# Altium PCB FZ2.PCBDOC
Units mm, origin at the board's own origin, x right, y up, seen from the top; angles counter-clockwise.
Board outline 278.13 x 144.14 mm, 2 copper layers (Top Layer, Bottom Layer); 35 components, 25 nets, 138 pads, 25 vias.
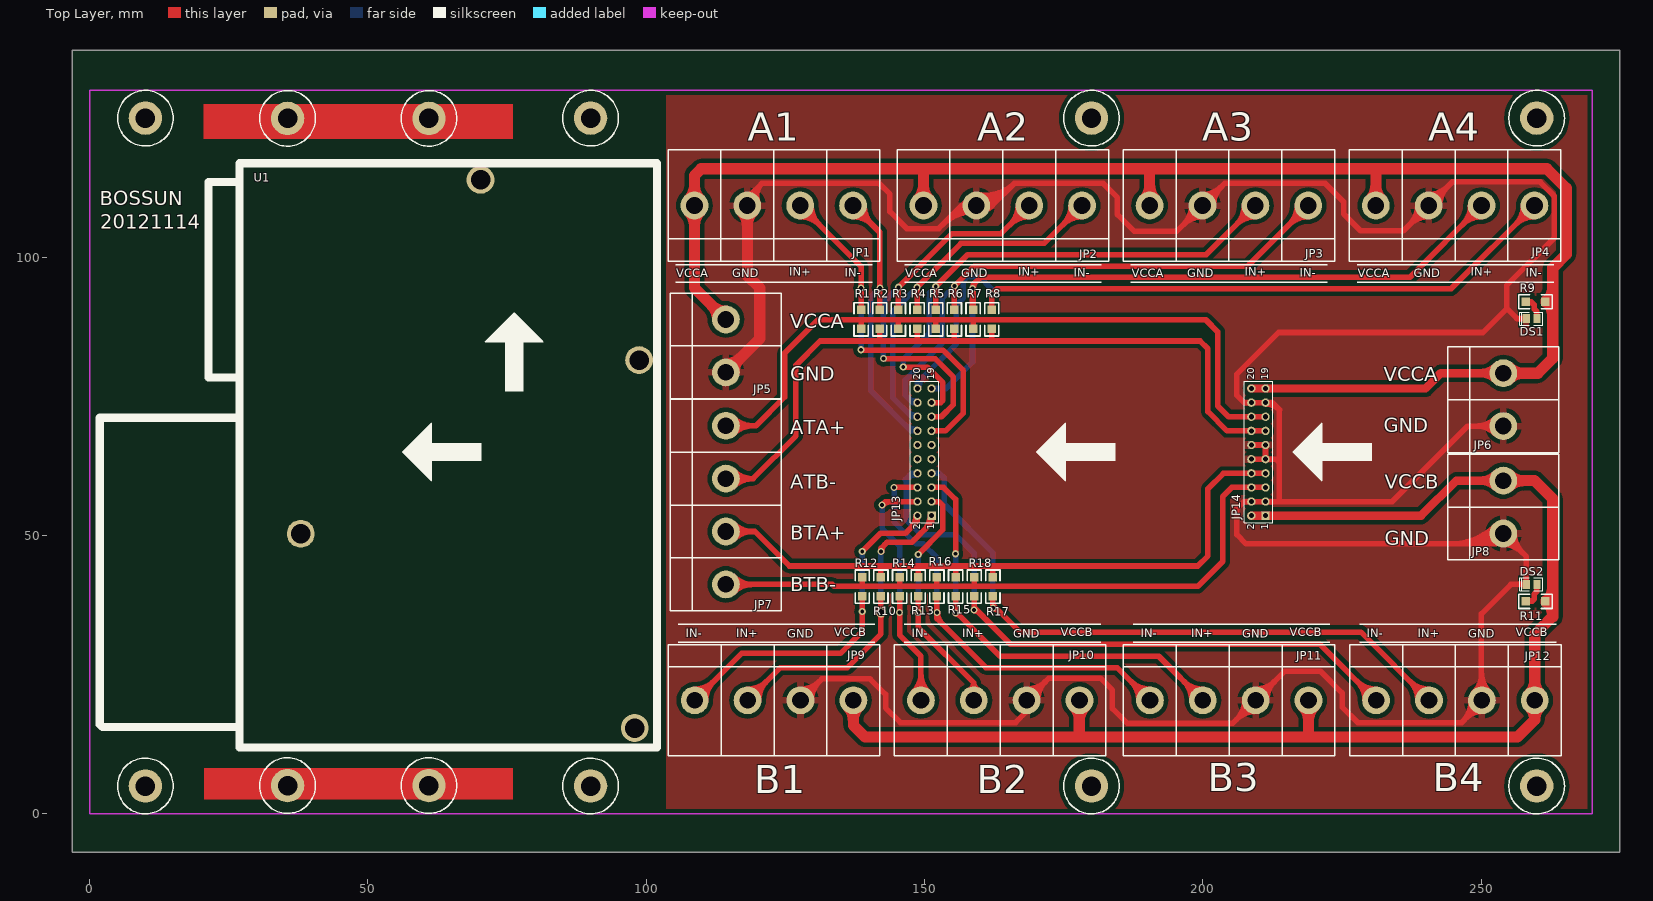
[diagram p0: Top Layer view]
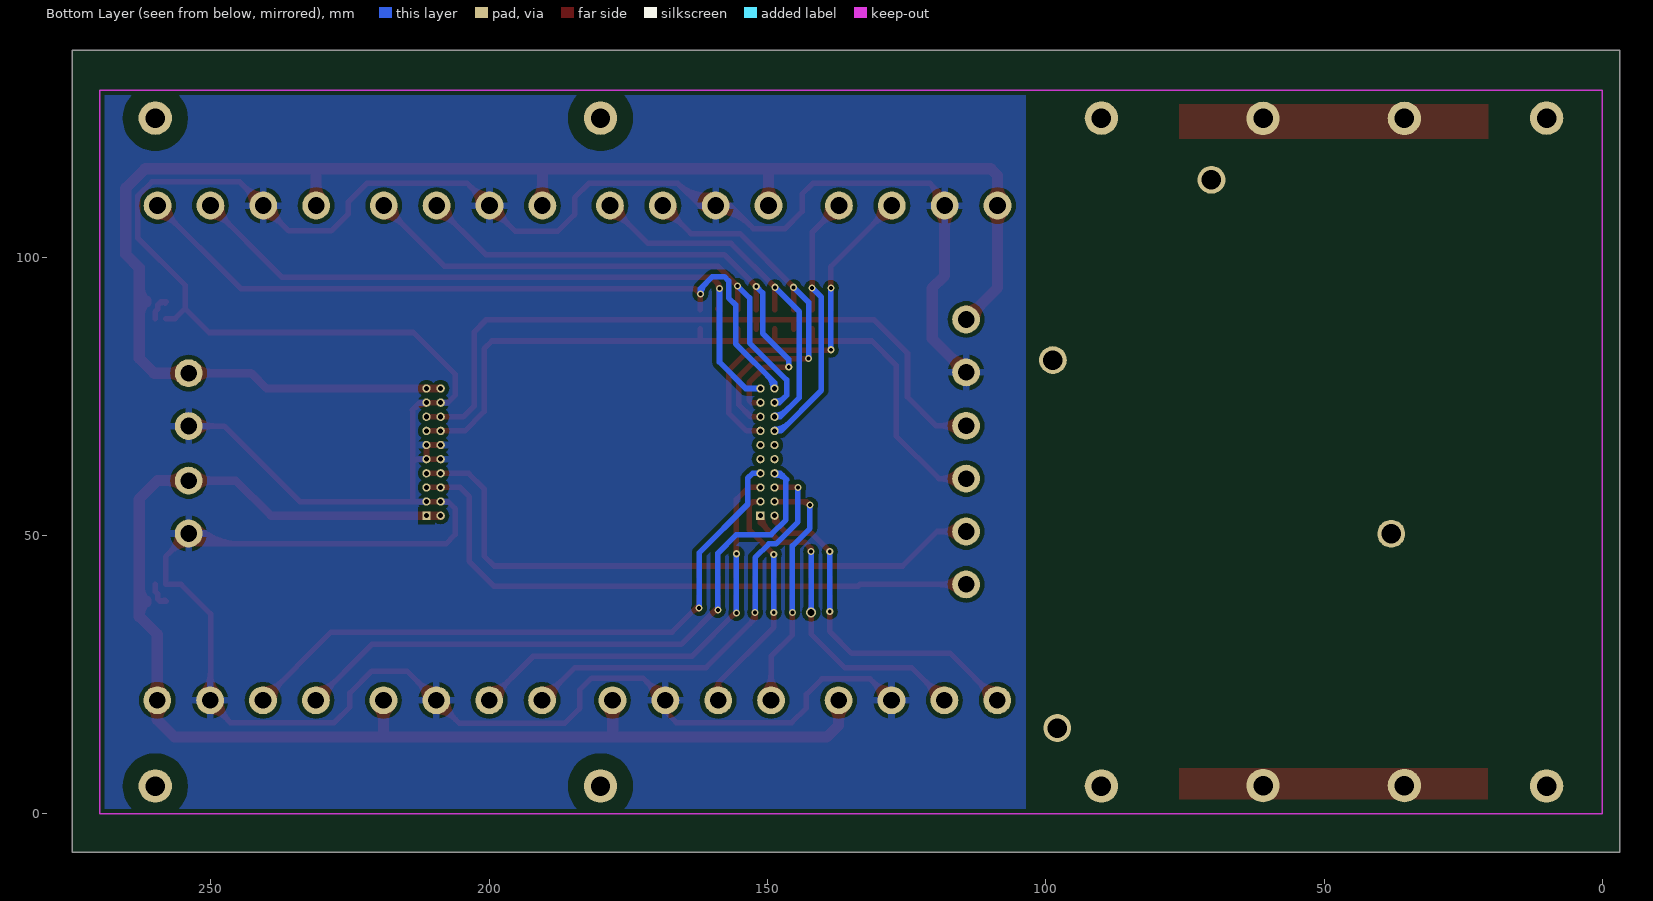
[diagram p1: Bottom Layer view, seen from below]

## Layer stack, top to bottom
Top Layer: signal copper 0.0356
Dielectric: dielectric 0.32, FR-4, Dk 4.8
Bottom Layer: signal copper 0.0356

## Board outline
-2.032,137.24 274.955,137.24 274.955,-6.905 -3.175,-6.905 -3.175,137.24

## Design rules (kind name [scope] priority, off if disabled: settings)
Clearance Clearance_1 [(InPolygon)] p1: gap=0.762
Clearance [All] p2: gap=0.254
ComponentClearance [All] p1: gap=0.254 collisioncheckmode=0
HoleSize [All] p1: absolutevalues=TRUE maxlimit=100 minlimit=0.025 maxpercent=80.000 minpercent=20.000
PolygonConnect [All] p1: connectstyle=Relief reliefconductorwidth=1.27 reliefentries=4 polygonreliefangle="90 Angle"
RoutingVias [All] p1: holewidth=1.27 width=1.778 viastyle="Through Hole" minholewidth=0.711 minwidth=1.27 maxholewidth=2.54 maxwidth=2.54
SolderMaskExpansion [All] p1: expansion=0.102
TestPointUsage [All] p1: valid=0 allowmultiple=FALSE
Testpoint [All] p1: side=15 testpointundercomponent=TRUE minsize=1.016 maxsize=2.54 preferedsize=1.524 minholesize=0 maxholesize=1.016 preferedholesize=0.813 testpointgrid=0.025 style=1023 order=1234567890
Width [All] p1: maxlimit=100 minlimit=0.254 preferedwidth=0.254
16 further rules are at their usual default settings.

## Components (designator, comment, footprint, x,y, rotation, side; value= is the part's Value field where it differs from the comment)
DS1 "POWER-A" "SMD _LED" 259.08,88.98 r0 top
DS2 "POWER-B" "SMD _LED" 259.08,41.228 r0 top
JP1 "Header 4" duanzi-4 137.16,109.3 r180 top
JP2 "Header 4" duanzi-4 178.308,109.3 r180 top
JP3 "Header 4" duanzi-4 218.948,109.3 r180 top
JP4 "Header 4" duanzi-4 259.588,109.3 r180 top
JP5 "Header 2" duanzi-2 114.3,79.328 r90 top
JP6 "Header 2" duanzi-2 254,69.676 r90 top
JP7 "Header 4" duanzi-4 114.3,41.228 r90 top
JP8 "Header 2" duanzi-2 254,50.372 r90 top
JP9 "Header 4" duanzi-4 108.712,20.4 r0 top
JP10 "Header 4" duanzi-4 149.352,20.4 r0 top
JP11 "Header 4" duanzi-4 190.5,20.4 r0 top
JP12 "Header 4" duanzi-4 231.14,20.4 r0 top
JP13 "Header 10X2" HDR2X10 151.27,53.57 r90 top
JP14 "Header 10X2" HDR2X10 211.27,53.57 r90 top
R1 "Res2" 1206 138.608,87.122 r90 top
R2 "Res2" 1206 141.961,87.122 r90 top
R3 "Res2" 1206 145.313,87.122 r90 top
R4 "Res2" 1206 148.666,87.122 r90 top
R5 "Res2" 1206 152.019,87.122 r90 top
R6 "Res2" 1206 155.372,87.122 r90 top
R7 "Res2" 1206 158.725,87.122 r90 top
R8 "Res2" 1206 162.077,87.122 r90 top
R9 "Res2" 1206 258.064,92.028 r0 top
R10 "Res2" 1206 142.164,42.545 r270 top
R11 "Res2" 1206 258.064,38.18 r0 top
R12 "Res2" 1206 138.811,42.545 r270 top
R13 "Res2" 1206 148.869,42.545 r270 top
R14 "Res2" 1206 145.517,42.545 r270 top
R15 "Res2" 1206 155.575,42.545 r270 top
R16 "Res2" 1206 152.222,42.545 r270 top
R17 "Res2" 1206 162.281,42.545 r270 top
R18 "Res2" 1206 158.928,42.545 r270 top
U1 "MODE" sw-tcpip 26.924,116.92 r270 top locked

## Footprints (in the part's own frame and the unit in brackets; to place one, negate y for a bottom-side part, rotate by r counter-clockwise, add the part's x,y. Pads: shape width x height; smd on the part's side, far side on the other; paste and mask are expansions set on the pad)
1206 [mil]
  rect 60x60 smd: 1(0,0) 2(135,0)
  silkscreen extent -50,-50 185,50
duanzi-2 [mm]
  round 5 hole 3: 1(0,0) 2(9.5,0)
  silkscreen extent -4.75,-10 14.25,10
duanzi-4 [mm]
  round 5 hole 3: 1(0,0) 2(9.5,0) 3(18.999,0) 4(28.499,0)
  silkscreen extent -4.75,-10 33.25,10
HDR2X10 [mm] "Connector; Header; 10x2 Position"
  rect 1.5x1.5 hole 0.9: 1(0,0)
  round 1.5 hole 0.9: 2(0,2.54) 3(2.54,0) 4(2.54,2.54) 5(5.08,0) 6(5.08,2.54) 7(7.62,0) 8(7.62,2.54) 9(10.16,0) 10(10.16,2.54) 11(12.7,0) 12(12.7,2.54) 13(15.24,0) 14(15.24,2.54) 15(17.78,0) 16(17.78,2.54) 17(20.32,0) 18(20.32,2.54) 19(22.86,0) 20(22.86,2.54)
  silkscreen extent -1.27,-1.27 24.13,3.81
"SMD _LED" [mm]
  rect 1.3x1.6 smd: 1(0.95,0) 2(-0.95,0)
  silkscreen extent -2.13,-1.15 2,1.15
sw-tcpip [mm]
  round 5 hole 3.5: 1(3,43.3) 2(35.4,71.8) 3(101.5,71) 4(66.6,11)
  silkscreen extent 0,-25.1 105,75

## Part data
DS1 DS2: library part LED3, "Typical BLUE SiC LED"
JP1 JP2 JP3 JP4 JP7 JP9 JP10 JP11 JP12: "Header, 4-Pin"
JP5 JP6 JP8: "Header, 2-Pin"
JP13 JP14: library part "Header 5X2", "Header, 5-Pin, Dual row"
R1 R2 R3 R4 R5 R6 R7 R8 R9 R10 R11 R12 R13 R14 R15 R16 R17 R18: "Resistor"
U1: library part PLL, "Generic Phase Locked Loop"

## Free pads (board coordinates)
  round 6 hole 3.5: 0(10,5) 0(10,125) 0(35.56,5.08) 0(35.56,124.968) 0(60.96,5.08) 0(60.96,124.968) 0(90,5) 0(90,125) 0(180,5) 0(180,125) 0(260,5) 0(260,125)

## Via types
v1: diameter 1.27, hole 0.711, Top Layer to Bottom Layer, 24 vias
v2: diameter 1.778, hole 1.27, Top Layer to Bottom Layer, 1 vias

## Nets (pads, with @x,y where several pads share a name; then routed paths per layer and width w, separated by ;. In a path a pad name is that pad's centre, name@x,y a point inside that pad or via, vN(x,y) a via of type N, cw(c..) or ccw(c..) an arc to the next point about the centre after c; other vN are vias at no path point)
485AA+: JP7.4 JP14.15 JP14.16 R1.1 R3.1 R5.1 R7.1 | length 138.7
  Top Layer w1: JP7.4 119.685,69.727 124.841,74.883 124.841,82.757 130.857,88.773 200.533,88.773 202.692,86.614 202.692,73.279 204.621,71.35 JP14.15 ; JP7.4@115.714,68.313 cw(c119.128,64.899) 119.128,69.727 cw(c119.128,74.556) JP7.4@115.714,71.141 ; R1.1 138.608,88.773 ; R3.1 145.313,88.748 ; R5.1 152.019,88.697 ; 158.42,88.773 158.725,88.468 R7.1
485AB-: JP7.3 JP14.13 JP14.14 R2.1 R4.1 R6.1 R8.1 | length 144
  Top Layer w1: JP7.3 119.202,60.227 126.873,67.898 126.873,80.598 131.238,84.963 199.517,84.963 200.914,83.566 200.914,72.263 204.367,68.81 JP14.13 ; JP7.3@115.714,58.813 cw(c119.128,55.399) 119.128,60.227 cw(c119.128,65.056) JP7.3@115.714,61.641 ; 141.961,85.014 R2.1 ; 148.666,85.115 R4.1 ; 155.372,84.963 R6.1 ; 162.077,84.988 R8.1
485BA+: JP7.2 JP14.7 JP14.8 R10.1 R13.1 R15.1 R17.1 | length 128.4
  Top Layer w1: JP7.2 119.532,50.728 125.73,44.53 199.089,44.53 200.914,46.355 200.914,58.42 203.684,61.19 JP14.7 ; JP7.2@115.714,49.314 cw(c119.128,45.9) 119.128,50.728 cw(c119.128,55.556) JP7.2@115.714,52.142 ; R10.1 142.164,44.247 ; R13.1 148.869,44.298 ; R15.1 155.575,44.403 ; R17.1 162.281,44.505
485BB-: JP7.1 JP14.5 JP14.6 R12.1 R14.1 R16.1 R18.1 | length 124.9
  Top Layer w1: JP7.1 133.397,41.228 133.731,40.894 199.136,40.894 203.581,45.339 203.581,57.023 205.208,58.65 JP14.5 ; JP7.1@115.714,39.814 cw(c119.128,36.4) 119.128,41.228 cw(c119.128,46.056) JP7.1@115.714,42.642 ; 138.811,40.894 R12.1 ; 145.517,40.996 R14.1 ; 152.222,40.97 R16.1 ; 158.928,41.326 R18.1
A0: JP1.2 JP13.13 R1.2 | length 76.5
  Top Layer w1: JP1.2@127.66,107.3 cw(c127.66,102.472) 131.074,105.886 cw(c134.488,109.3) JP1.2@129.66,109.3 ; JP1.2 138.608,98.352 R1.2 ; v1(138.608,83.388) 138.684,83.312 153.289,83.312 156.972,79.629 156.972,72.009 153.773,68.81 JP13.13
  Bottom Layer w1: v1(138.608,83.388) v1(138.608,94.488)
A1: JP1.1 JP13.14 R2.2 | length 61.4
  Top Layer w1: JP1.1@137.16,107.3 cw(c137.16,102.472) 140.574,105.886 cw(c143.988,109.3) JP1.1@139.16,109.3 ; JP1.1 141.961,104.499 R2.2
  Bottom Layer w1: v1(141.961,94.488) 140.335,92.862 140.335,76.073 147.598,68.81 JP13.14 ; 146.371,70.037 ccw(c148.73,72.396) JP13.14@148.73,69.06
A2: JP2.2 JP13.15 R3.2 | length 78.9
  Top Layer w1: v1(142.621,81.788) 151.892,81.788 155.194,78.486 155.194,73.533 153.011,71.35 JP13.15 ; R3.2 v1(145.313,94.615) 154.965,104.267 163.775,104.267 JP2.2 ; JP2.2@166.808,109.3 cw(c161.98,109.3) 165.394,105.886 cw(c168.808,102.472) JP2.2@168.808,107.3
  Bottom Layer w1: v1(142.621,81.788) 142.621,91.923 v1(145.313,94.615)
A3: JP2.1 JP13.16 R4.2 | length 77.3
  Top Layer w1: R4.2 v1(148.666,94.615) 156.54,102.489 171.497,102.489 JP2.1 ; JP2.1@176.308,109.3 cw(c171.48,109.3) 174.894,105.886 cw(c178.308,102.472) JP2.1@178.308,107.3
  Bottom Layer w1: 146.588,72.487 ccw(c148.73,74.63) JP13.16@148.73,71.6 ; v1(148.666,94.615) 144.272,90.221 144.272,74.803 147.725,71.35 JP13.16
A4: JP3.2 JP13.17 R5.2 | length 105.9
  Top Layer w1: v1@146.304,80.391 v1(146.177,80.264) 150.495,80.264 153.289,77.47 153.289,74.295 152.884,73.89 JP13.17 ; R5.2 v1(152.019,94.742) 157.734,100.457 200.605,100.457 JP3.2 ; JP3.2@207.448,109.3 cw(c202.62,109.3) 206.034,105.886 cw(c209.448,102.472) JP3.2@209.448,107.3
  Bottom Layer w1: v1(146.177,80.264) 146.177,81.661 150.869,86.353 150.869,93.592 v1(152.019,94.742)
A5: JP3.1 JP13.18 R6.2 | length 109.4
  Top Layer w1: R6.2 v1(155.372,94.869) 158.928,98.425 208.073,98.425 JP3.1 ; JP3.1@216.948,109.3 cw(c212.12,109.3) 215.534,105.886 cw(c218.948,102.472) JP3.1@218.948,107.3
  Bottom Layer w1: 146.997,74.745 ccw(c148.488,76.236) JP13.18@148.704,74.139 ; JP13.18 147.852,73.89 146.558,75.184 146.558,77.978 153.212,84.632 153.212,92.71 v1(155.372,94.869)
A6: JP4.2 JP13.19 R7.2 | length 138.1
  Top Layer w1: R7.2@158.623,90.424 v1(158.623,94.386) ; 158.623,91.429 ccw(c159.602,91.429) R7.2@158.91,90.736 ; R7.2 158.725,95.098 160.02,96.393 237.181,96.393 JP4.2 ; v1@158.758,94.386 cw(c160.556,94.386) 159.285,95.658 ; JP4.2@248.088,109.3 cw(c243.26,109.3) 246.674,105.886 cw(c250.088,102.472) JP4.2@250.088,107.3
  Bottom Layer w1: JP13.19 153.9,76.43 158.623,81.153 v1(158.623,94.386)
A7: JP4.1 JP13.20 R8.2 | length 149.1
  Top Layer w1: R8.2 162.077,93.37 163.068,94.361 244.649,94.361 JP4.1 ; JP4.1@257.588,109.3 cw(c252.76,109.3) 256.174,105.886 cw(c259.588,102.472) JP4.1@259.588,107.3
  Bottom Layer w1: JP13.20 148.73,77.483 155.702,84.455 155.702,91.44 156.972,92.71 156.972,95.758 157.734,96.52 159.893,96.52 162.052,94.361 v1(162.052,93.396) ; JP13.20@148.98,76.43 cw(c152.126,76.43) 149.901,78.654 ; 161.139,95.274 cw(c159.261,93.396) v1@161.917,93.396
B0: JP9.2 JP13.1 R10.2 | length 76
  Top Layer w0.8: JP9.2 JP9.2@118.212,20.803
  Top Layer w1: JP9.2 124.101,26.289 136.144,26.289 142.164,32.309 R10.2 ; JP9.2@118.212,22.4 ccw(c118.212,27.228) 121.626,23.814 ccw(c125.04,20.4) JP9.2@120.212,20.4 ; v2@141.889,35.92 cw(c141.225,35.256) 142.164,35.256 cw(c143.103,35.256) v2@142.439,35.92 ; v2@141.889,36.47 ccw(c141.225,37.134) 142.164,37.134 ccw(c143.103,37.134) v2@142.439,36.47 ; v1(142.164,47.117) 142.164,47.676 143.256,48.768 147.701,48.768 151.27,52.337 JP13.1 ; v1@142.299,47.117 cw(c143.974,47.117) 142.789,48.301 ; 149.971,51.038 ccw(c147.44,53.57) JP13.1@151.02,53.57
  Bottom Layer w1: v2@141.889,36.47 ccw(c141.225,37.134) 142.164,37.134 ccw(c143.103,37.134) v2@142.439,36.47 ; v2(142.164,36.195) v1(142.164,47.117)
B1: JP9.1 JP13.2 R12.2 | length 75.4
  Top Layer w1: JP9.1 117.141,28.829 134.874,28.829 138.811,32.766 R12.2 ; JP9.1@108.712,22.4 ccw(c108.712,27.228) 112.126,23.814 ccw(c115.54,20.4) JP9.1@110.712,20.4 ; v1(138.811,47.117) 142.113,50.419 146.558,50.419 148.73,52.591 JP13.2 ; 147.611,51.472 ccw(c145.513,53.57) JP13.2@148.48,53.57
  Bottom Layer w1: v1(138.811,36.322) v1(138.811,47.117)
B2: JP10.2 JP13.3 R13.2 | length 49.5
  Top Layer w1: R13.2 148.869,33.503 158.852,23.52 ; v1(148.869,46.634) 153.289,51.054 153.289,55.372 152.551,56.11 JP13.3 ; JP10.2@158.017,22.217 ccw(c157.419,23.52) 158.852,23.52 ; JP10.2 158.852,23.52 ; JP10.2@159.687,22.217 cw(c160.285,23.52) 158.852,23.52
  Bottom Layer w1: v1(148.869,36.195) v1(148.869,46.634)
B3: JP10.1 JP13.4 R14.2 | length 57
  Top Layer w1: v1(142.367,55.499) 142.978,56.11 JP13.4 ; v1@142.462,55.404 cw(c144.168,53.698) 144.168,56.11 ; R14.2 145.517,32.156 149.352,28.321 JP10.1 ; JP10.1@147.938,21.814 ccw(c144.524,25.228) 149.352,25.228 ccw(c154.18,25.228) JP10.1@150.766,21.814
  Bottom Layer w1: v1(142.367,55.499) 142.367,51.308 145.517,48.158 v1(145.517,36.195)
B4: JP11.2 JP13.5 R15.2 | length 88
  Top Layer w1: JP13.5 153.44,58.65 155.575,56.515 v1(155.575,46.736) ; v1@155.575,35.933 cw(c155.575,34.994) 156.239,35.658 ; v1(155.575,36.068) R15.2 ; v1@155.575,36.322 163.576,28.321 192.079,28.321 JP11.2 ; JP11.2@198,20.4 ccw(c193.172,20.4) 196.586,23.814 ccw(c200,27.228) JP11.2@200,22.4
  Bottom Layer w1: v1(155.575,36.068) v1(155.575,46.736)
B5: JP11.1 JP13.6 R16.2 | length 88.9
  Top Layer w1: v1(144.526,58.65) JP13.6 ; R16.2 152.222,35.103 161.036,26.289 184.611,26.289 JP11.1 ; v1@152.357,36.195 ccw(c155.32,36.195) 153.225,34.1 ; JP11.1@188.5,20.4 ccw(c183.672,20.4) 187.086,23.814 ccw(c190.5,27.228) JP11.1@190.5,22.4
  Bottom Layer w1: v1(144.526,58.65) 144.526,52.451 148.463,48.514 149.733,48.514 152.222,46.025 v1(152.222,36.195)
B6: JP12.2 JP13.7 R17.2 | length 126
  Top Layer w1: v1@162.281,36.847 cw(c162.281,35.295) 163.378,36.393 ; v1(162.281,36.982) R17.2 ; v1@162.281,37.49 167.132,32.639 228.401,32.639 JP12.2 ; JP12.2@238.64,20.4 ccw(c233.812,20.4) 237.226,23.814 ccw(c240.64,27.228) JP12.2@240.64,22.4
  Bottom Layer w1: JP13.7 152.678,61.19 153.543,60.325 153.543,55.626 162.281,46.888 v1(162.281,36.982)
B7: JP12.1 JP13.8 R18.2 | length 129
  Top Layer w1: v1@158.928,36.492 cw(c158.928,35.185) 159.852,36.109 ; v1(158.928,36.627) R18.2 ; v1@158.928,37.033 165.481,30.48 221.06,30.48 JP12.1 ; JP12.1@229.14,20.4 ccw(c224.312,20.4) 227.726,23.814 ccw(c231.14,27.228) JP12.1@231.14,22.4
  Bottom Layer w1: 146.506,60.019 cw(c148.73,57.794) JP13.8@148.73,60.94 ; 147.151,60.664 cw(c148.114,59.7) JP13.8@148.634,60.959 ; JP13.8 147.677,61.19 146.685,60.198 146.685,52.832 149.352,50.165 155.575,50.165 158.928,46.812 v1(158.928,36.627)
GND: DS1.2 DS2.2 JP1.3 JP2.3 JP3.3 JP4.3 JP5.1 JP6.1 JP8.1 JP9.3 JP10.3 JP11.3 JP12.3 JP14.3 JP14.4 JP14.9 JP14.10 JP14.11 JP14.12 JP14.17 JP14.18 | length 807.1
  Top Layer w1: JP1.3 118.161,110.668 120.777,113.284 ; JP1.3@118.161,111.3 ccw(c118.161,112.826) 119.24,111.747 ; JP1.3@119.101,109.64 cw(c121.374,110.463) 119.665,112.172 ; JP1.3@120.041,109.981 cw(c123.007,111.054) 120.777,113.284 ; JP9.3 131.568,24.257 140.208,24.257 143.002,21.463 143.002,19.05 145.669,16.383 166.37,16.383 168.351,18.364 JP10.3 172.335,24.384 181.61,24.384 183.769,22.225 183.769,18.923 186.436,16.256 205.355,16.256 214.753,25.654 221.107,25.654 225.044,21.717 225.044,19.177 227.838,16.383 246.507,16.383 JP12.3@250.317,20.193 ; JP9.3@127.711,22.4 ccw(c127.711,27.228) 131.125,23.814 ccw(c134.54,20.4) JP9.3@129.711,20.4 ; 153.099,105.728 cw(c159.309,99.518) JP2.3@159.309,108.3 ; 154.806,107.435 cw(c159.309,102.932) JP2.3 ccw(c160.137,113.862) 163.416,110.584 ; 156.513,109.142 cw(c159.309,106.346) JP2.3@159.309,110.3 ; JP2.3@157.383,108.76 ccw(c156.671,108.561) 156.671,109.3 ; JP2.3@157.383,109.84 cw(c156.671,110.039) 156.671,109.3 ; JP2.3@159.13,108.316 ccw(c159.722,111.577) 162.066,109.234 ; JP2.3@159.487,110.284 ccw(c160.552,116.148) 164.766,111.934 ; JP2.3@159.666,111.268 ccw(c160.966,118.433) 166.116,113.284 ; JP2.3@161.196,108.637 cw(c162.132,108.308) 162.132,109.3 ; JP2.3@161.196,109.963 ccw(c162.132,110.292) 162.132,109.3 ; JP10.3@168.351,22.4 ccw(c168.351,27.228) 171.765,23.814 ccw(c175.18,20.4) JP10.3@170.351,20.4 ; JP3.3@197.949,109.3 cw(c193.12,109.3) 196.535,105.886 cw(c199.949,102.472) JP3.3@199.949,107.3 ; JP3.3@199.949,111.3 ccw(c199.949,116.128) 203.363,112.714 ccw(c206.777,109.3) JP3.3@201.949,109.3 ; JP11.3@207.499,20.4 cw(c202.671,20.4) 206.085,16.986 cw(c209.499,13.572) JP11.3@209.499,18.4 ; JP14.10 213.13,63.73 213.741,63.119 ; JP14.12 JP14.11 JP14.9 ; JP11.3@209.499,22.4 ccw(c209.499,27.228) 212.913,23.814 ccw(c216.328,20.4) JP11.3@211.499,20.4 ; JP14.17@211.27,73.64 cw(c211.27,70.079) 213.788,72.597 ; JP14.17@211.358,73.656 cw(c211.939,72.109) 213.107,73.278 ; 213.741,56.11 213.741,72.644 212.495,73.89 207.415,73.89 206.121,75.184 206.121,78.994 213.614,86.487 250.317,86.487 254.635,90.805 ; JP4.3@238.589,109.3 cw(c233.76,109.3) 237.175,105.886 cw(c240.589,102.472) JP4.3@240.589,107.3 ; JP4.3@240.589,111.3 ccw(c240.589,116.128) 244.003,112.714 ccw(c247.417,109.3) JP4.3@242.589,109.3 ; 244.686,48.514 ccw(c244.686,59.686) JP8.1@252.586,51.786 ; 246.7,16.576 ccw(c243.205,20.07) JP12.3@248.141,20.305 ; 247.1,48.514 ccw(c247.1,57.272) JP8.1@253.293,51.079 ; 247.382,17.258 cw(c250.139,14.501) JP12.3@250.139,18.4 ; 248.298,18.174 ccw(c246.257,20.215) JP12.3@249.14,20.352 ; JP12.3@248.725,21.814 ccw(c245.495,25.044) 250.063,25.044 ; 249.514,48.514 ccw(c249.514,54.858) JP8.1 ; JP12.3@250.063,20.193 250.063,35.941 255.35,41.228 DS2.2 258.13,46.242 JP8.1 ; 250.063,22.998 ccw(c252.737,22.998) JP12.3@250.846,21.107 ; 250.063,25.412 ccw(c255.152,25.412) JP12.3@251.553,21.814 ; 251.929,48.514 ccw(c251.929,52.443) JP8.1@254.707,49.665 ; JP8.1@252.26,49.385 cw(c251.629,49.027) 252.142,48.514 ; JP6.1@252.586,68.262 ccw(c249.172,64.848) 249.172,69.676 ccw(c249.172,74.504) JP6.1@252.586,71.09 ; JP8.1@253.013,48.632 ccw(c252.655,48.001) 252.142,48.514 ; JP8.1@254,48.372 cw(c254,43.544) 257.414,46.958 cw(c260.828,50.372) JP8.1@256,50.372 ; JP6.1 247.603,69.676 234.037,56.11 207.367,56.11 206.121,54.864 206.121,50.165 207.772,48.514 252.142,48.514 ; DS1.2 256.46,88.98 254.635,90.805 ; 120.777,113.284 141.859,113.284 143.764,111.379 143.764,108.204 146.812,105.156 152.527,105.156 156.671,109.3 ; 156.671,109.3 162.132,109.3 ; 162.132,109.3 166.116,113.284 ; 166.116,113.284 182.118,113.284 184.658,110.744 184.658,107.696 187.706,104.648 195.297,104.648 203.933,113.284 221.996,113.284 225.298,109.982 225.298,107.823 228.346,104.775 236.064,104.775 244.827,113.538 260.604,113.538 263.144,110.998 263.144,103.505 254.635,94.996 254.635,90.805 ; 252.142,48.514 JP8.1
  Top Layer w2: JP5.1 120.396,85.424 120.396,94.441 118.161,96.676 JP1.3 ; JP5.1@114.3,80.828 ccw(c114.3,84.449) 116.861,81.889 ccw(c119.421,79.328) JP5.1@115.8,79.328 ; JP1.3@117.1,108.239 cw(c114.539,105.679) 118.161,105.679 cw(c121.782,105.679) JP1.3@119.221,108.239
NetDS1_1: DS1.1 R9.1 | length 5.8
  Top Layer w1: R9.1 259,92.028 259.588,91.44 259.588,90.678 260.03,90.236 DS1.1 ; R9.1@258.174,91.79 cw(c258.656,90.748) 259.468,91.56
NetDS2_1: DS2.1 R11.1 | length 6
  Top Layer w1: R11.1 259.16,38.18 259.588,38.608 ; R11.1@258.19,38.41 ccw(c258.757,39.439) 259.588,38.608 ; DS2.1 260.03,39.939 259.588,39.497 259.588,38.608
VCCA: JP1.4 JP2.4 JP3.4 JP4.4 JP5.2 JP6.2 JP14.19 JP14.20 R9.2 | length 346.9
  Top Layer w1.5: JP14.20 240.006,76.43 242.752,79.176 JP6.2 ; JP6.2@252.763,77.939 ccw(c249.775,74.951) 249.775,79.176 ccw(c249.775,83.401) JP6.2@252.763,80.413
  Top Layer w2: JP1.4@107.6,108.239 cw(c105.039,105.679) 108.661,105.679 cw(c112.282,105.679) JP1.4@109.721,108.239 ; JP1.4@107.6,110.361 ccw(c105.039,112.921) 108.661,112.921 ccw(c112.282,112.921) JP1.4@109.721,110.361 ; JP5.2@112.8,88.828 ccw(c109.179,88.828) 111.739,91.389 ccw(c114.3,93.949) JP5.2@114.3,90.328 ; JP5.2 108.661,94.467 108.661,114.71 109.855,115.904 261.874,115.904 265.303,112.475 265.303,100.537 262.89,98.124 262.89,81.868 260.198,79.176 JP6.2 ; JP2.4@148.748,110.361 ccw(c146.187,112.921) 149.809,112.921 ccw(c153.43,112.921) JP2.4@150.869,110.361 ; JP2.4 149.809,115.599 ; JP3.4@189.388,110.361 ccw(c186.827,112.921) 190.449,112.921 ccw(c194.07,112.921) JP3.4@191.509,110.361 ; JP3.4 190.449,115.853 ; JP4.4@230.028,110.361 ccw(c227.467,112.921) 231.089,112.921 ccw(c234.71,112.921) JP4.4@232.149,110.361 ; JP4.4 231.089,115.472 ; JP6.2@255.061,78.115 cw(c257.621,75.555) 257.621,79.176 cw(c257.621,82.797) JP6.2@255.061,80.237 ; R9.2@261.661,91.86 ccw(c258.695,94.826) 262.89,94.826 ; R9.2@261.661,92.196 cw(c258.695,89.23) 262.89,89.23
VCCB: JP8.2 JP9.4 JP10.4 JP11.4 JP12.4 JP14.1 JP14.2 R11.2 | length 289.6
  Top Layer w1.5: JP14.2 239.244,53.57 245.546,59.872 JP8.2 ; JP8.2@252.763,58.635 ccw(c249.775,55.647) 249.775,59.872 ccw(c249.775,64.097) JP8.2@252.763,61.109
  Top Layer w2: JP9.4@136.151,19.339 cw(c133.59,16.779) 137.211,16.779 cw(c140.833,16.779) JP9.4@138.272,19.339 ; JP9.4 137.211,15.904 139.319,13.796 256.54,13.796 259.639,16.895 ; JP10.4@176.791,19.339 cw(c174.353,16.902) 177.8,16.902 ; 177.8,13.796 JP10.4@177.8,20.349 ; 177.8,16.655 cw(c181.596,16.655) JP10.4@178.912,19.339 ; JP11.4@217.939,19.339 cw(c215.378,16.779) 218.999,16.779 cw(c222.621,16.779) JP11.4@220.06,19.339 ; 218.999,13.847 JP11.4 ; JP8.2@252.832,59.872 259.613,59.872 262.89,56.595 262.89,35.513 259.639,32.262 259.639,16.895 ; JP8.2@255.061,58.811 cw(c257.621,56.251) 257.621,59.872 cw(c257.621,63.493) JP8.2@255.061,60.933 ; JP12.4@258.579,21.461 ccw(c256.018,24.021) 259.639,24.021 ccw(c263.261,24.021) JP12.4@260.7,21.461 ; JP12.4@258.604,19.315 cw(c256.295,16.895) 259.639,16.895 ; JP12.4@260.675,19.315 ccw(c262.983,16.895) 259.639,16.895 ; R11.2@261.661,38.012 ccw(c258.695,40.978) 262.89,40.978 ; R11.2@261.661,38.348 cw(c258.695,35.382) 262.89,35.382
pads on no net: JP13.9 JP13.10 JP13.11 JP13.12 U1.1 U1.2 U1.3 U1.4

## Polygon pours and split planes (outlines as drawn)
GND on Top Layer (solid, remove dead copper): 103.632,130.048 103.632,0.381 269.875,0.381 269.875,129.794
GND on Bottom Layer (solid, remove dead copper): 103.632,130.048 103.632,-0.127 269.875,-0.127 269.875,129.794
no net on Top Overlay (solid): 81.368,85.002 76.263,90.106 70.905,84.748 81.622,84.748
no net on Top Overlay (solid): 175.133,70.104 170.029,65 175.387,59.642 175.387,70.358
no net on Top Overlay (solid): 221.234,70.104 216.13,65 221.488,59.642 221.488,70.358
no net on Top Overlay (solid): 61.214,70.104 56.11,65 61.468,59.642 61.468,70.358

## Keep-outs
Keep-Out Layer:
  lines w0.254: 270,0 0,0 0,130 270,130 ; 270.002,0 270.002,130

## Other copper
Top Layer:
  rectangle: 20.574,2.54 76.073,8.255
  rectangle: 20.447,121.285 76.073,127.508

## Silkscreen, mask and mechanical layers (free items; w line width, h text height)
Top Overlay:
  circle w0.254: c60.96,5.08 r5
  circle w0.254: c35.56,5.08 r5
  circle w0.254: c60.96,124.968 r5
  circle w0.254: c35.56,124.968 r5
  circle w0.254: c260,125 r5
  circle w0.254: c180,125 r5
  circle w0.254: c260,5 r5
  circle w0.254: c180,5 r5
  circle w0.254: c90,5 r5
  circle w0.254: c10,5 r5
  circle w0.254: c90,125 r5
  circle w0.254: c10,125 r5
  region: 74.637,84.876 74.637,75.859 77.939,75.859 77.939,84.876
  rectangle: 175.26,63.373 184.277,66.675
  rectangle: 221.361,63.373 230.378,66.675
  rectangle: 61.341,63.373 70.358,66.675
  lines w0.254: 105.283,95.504 140.589,95.504 ; 105.283,98.679 140.589,98.679 ; 105.74,30.861 141.046,30.861 ; 105.74,34.036 141.046,34.036 ; 146.38,30.861 181.686,30.861 ; 146.38,34.036 181.686,34.036 ; 146.431,95.504 181.737,95.504 ; 146.431,98.679 181.737,98.679 ; 187.071,95.504 222.377,95.504 ; 187.071,98.679 222.377,98.679 ; 187.528,30.861 222.834,30.861 ; 187.528,34.036 222.834,34.036 ; 227.711,95.504 263.017,95.504 ; 227.711,98.679 263.017,98.679 ; 228.168,30.861 263.474,30.861 ; 228.168,34.036 263.474,34.036
  text "A1" at 118.237,120.904 h5.08
  text "A2" at 159.512,120.904 h5.08
  text "A3" at 199.898,120.904 h5.08
  text "A4" at 240.538,120.904 h5.08
  text "BOSSUN" at 1.778,109.347 h2.54
  text "20121114" at 1.905,105.156 h2.54
  text "IN+" at 125.73,96.647 h1.52
  text "IN+" at 166.878,96.647 h1.52
  text "IN+" at 207.518,96.647 h1.52
  text "IN+" at 248.158,96.647 h1.52
  text "IN-" at 135.636,96.52 h1.52
  text "IN-" at 176.784,96.52 h1.52
  text "IN-" at 217.424,96.52 h1.52
  text "IN-" at 258.064,96.52 h1.52
  text "VCCA" at 105.41,96.393 h1.52
  text "GND" at 115.443,96.393 h1.52
  text "VCCA" at 146.558,96.393 h1.52
  text "GND" at 156.591,96.393 h1.52
  text "VCCA" at 187.198,96.393 h1.52
  text "GND" at 197.231,96.393 h1.52
  text "VCCA" at 227.838,96.393 h1.52
  text "GND" at 237.871,96.393 h1.52
  text "VCCA" at 125.857,87.249 h2.54
  text "GND" at 125.857,77.851 h2.54
  text "VCCA" at 232.537,77.724 h2.54
  text "GND" at 232.537,68.58 h2.54
  text "ATA+" at 125.857,68.199 h2.54
  text "ATB-" at 125.857,58.42 h2.54
  text "VCCB" at 232.664,58.42 h2.54
  text "BTA+" at 125.857,49.276 h2.54
  text "GND" at 232.664,48.26 h2.54
  text "BTB-" at 125.857,40.005 h2.54
  text "VCCB" at 133.807,31.877 h1.52
  text "VCCB" at 174.447,31.877 h1.52
  text "VCCB" at 215.595,31.877 h1.52
  text "VCCB" at 256.235,31.877 h1.52
  text "IN-" at 107.061,31.75 h1.52
  text "IN+" at 116.154,31.75 h1.52
  text "IN-" at 147.701,31.75 h1.52
  text "IN+" at 156.794,31.75 h1.52
  text "IN-" at 188.849,31.75 h1.52
  text "IN+" at 197.942,31.75 h1.52
  text "IN-" at 229.489,31.75 h1.52
  text "IN+" at 238.582,31.75 h1.52
  text "GND" at 125.298,31.623 h1.52
  text "GND" at 165.938,31.623 h1.52
  text "GND" at 207.086,31.623 h1.52
  text "GND" at 247.726,31.623 h1.52
  text "B3" at 200.914,4.064 h5.08
  text "B4" at 241.3,4.064 h5.08
  text "B1" at 119.38,3.683 h5.08
  text "B2" at 159.385,3.683 h5.08
Top Solder:
  rectangle: 21.717,3.556 75.184,7.239
  rectangle: 21.59,122.428 74.803,126.492

## Text inside footprints (layer, text, board x,y; h text height)
JP13: Top Overlay "2" at 149.238,51.03 h1.27 r90; Top Overlay "1" at 151.778,51.03 h1.27 r90; Top Overlay "19" at 151.778,77.954 h1.27 r90; Top Overlay "20" at 149.238,77.954 h1.27 r90
JP14: Top Overlay "2" at 209.238,51.03 h1.27 r90; Top Overlay "1" at 211.778,51.03 h1.27 r90; Top Overlay "19" at 211.778,77.954 h1.27 r90; Top Overlay "20" at 209.238,77.954 h1.27 r90